# Altium PCB miniboar.PcbDoc
Units mil, origin at the board's own origin, x right, y up, seen from the top; angles counter-clockwise.
Board outline 2075 x 1385.55 mil, 2 copper layers (Top Layer, Bottom Layer); 66 components, 47 nets, 245 pads, 70 vias.
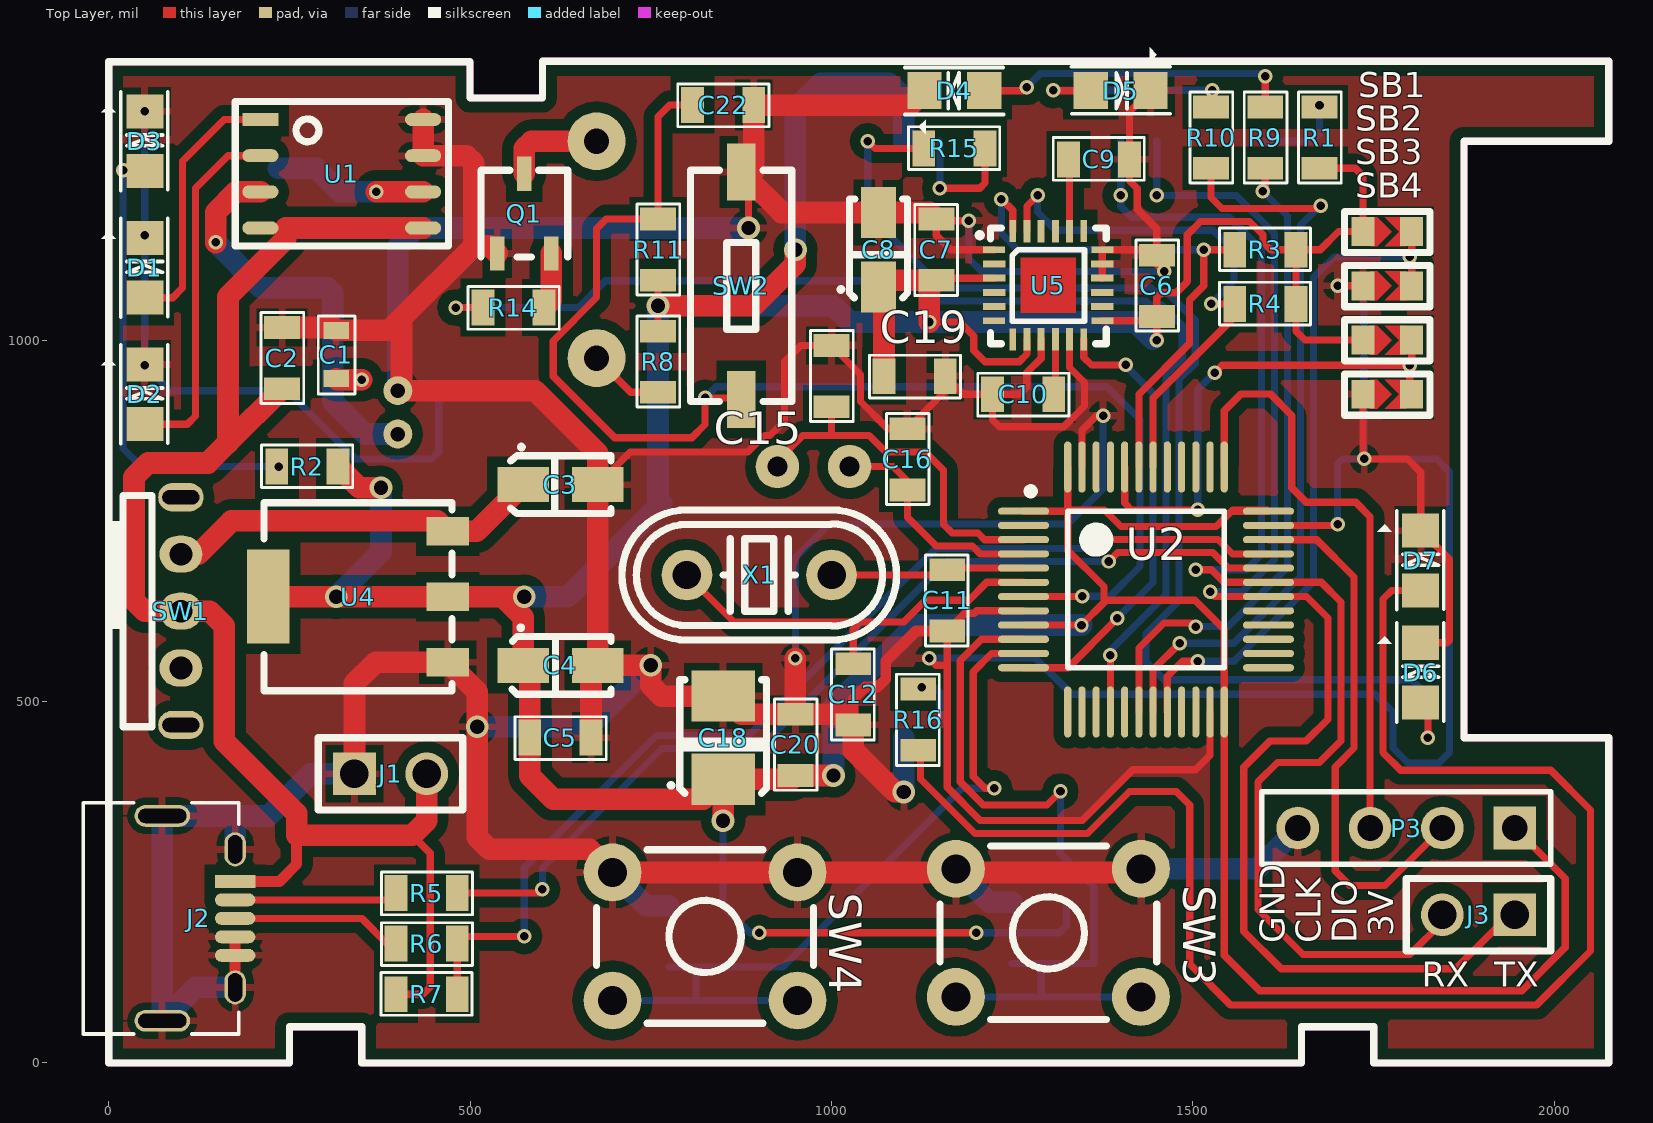
[diagram p0: Top Layer view]
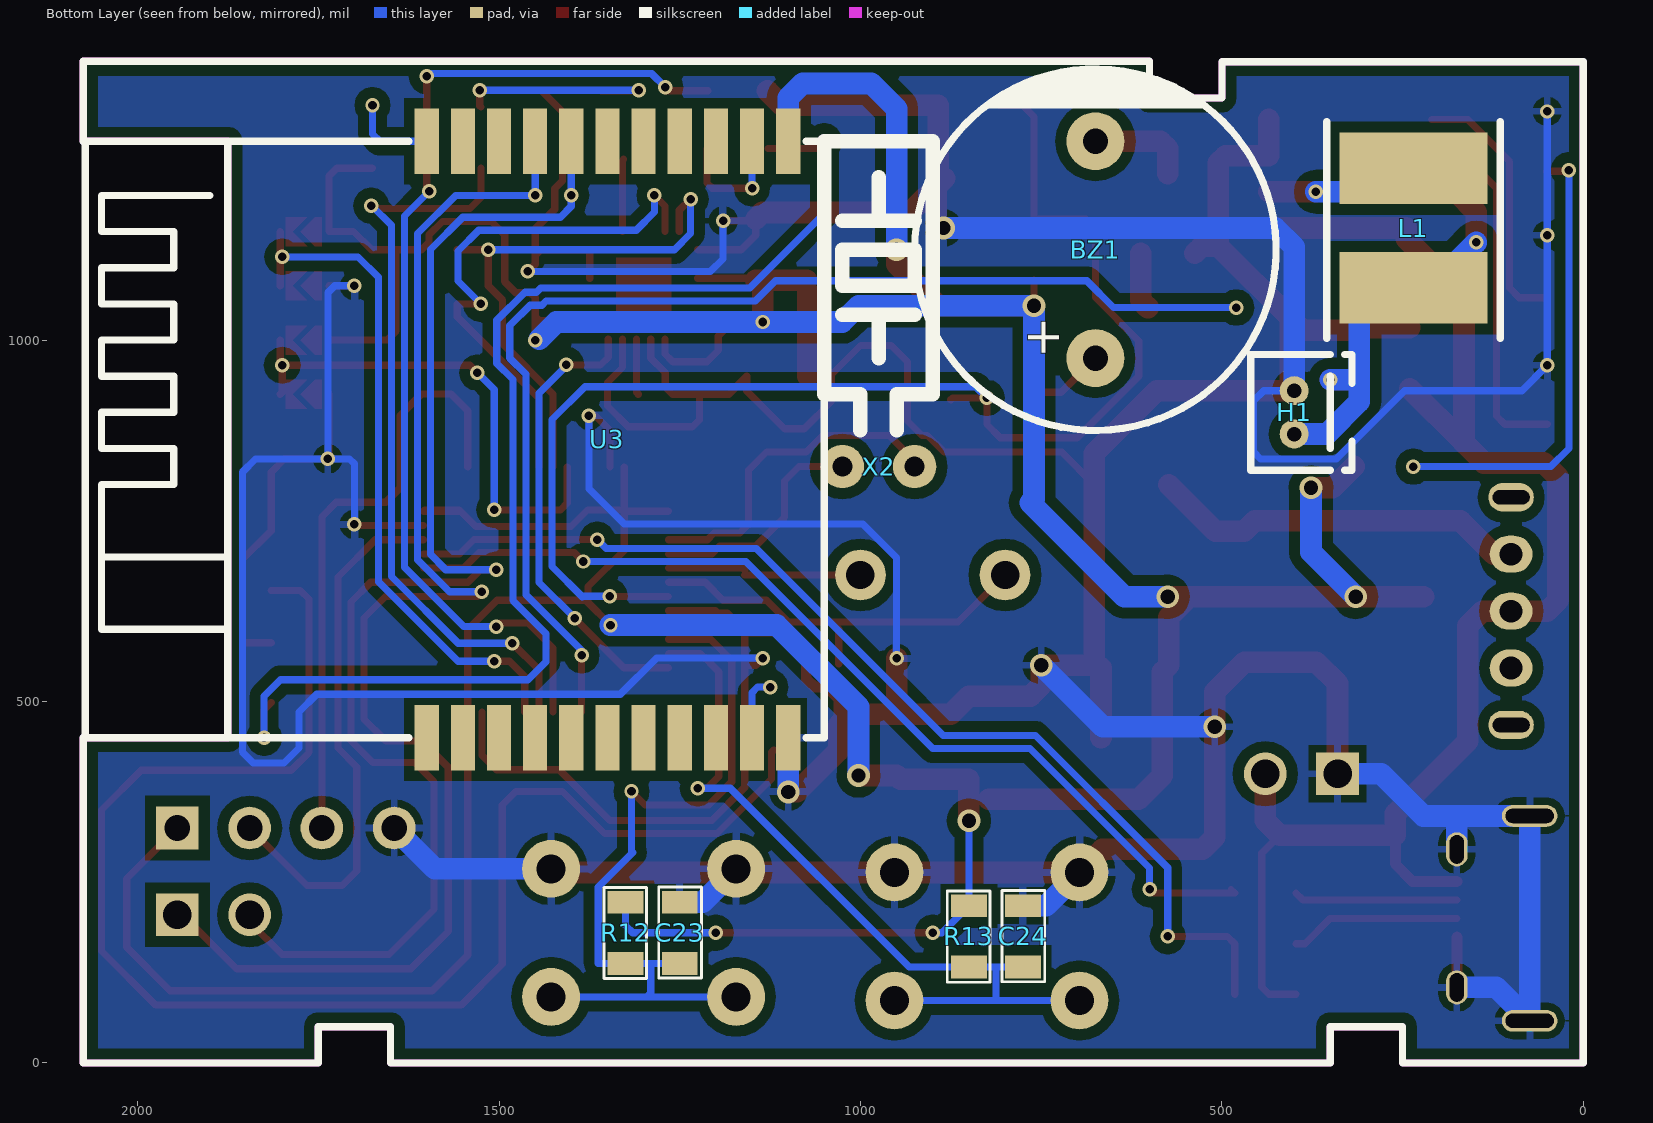
[diagram p1: Bottom Layer view, seen from below]
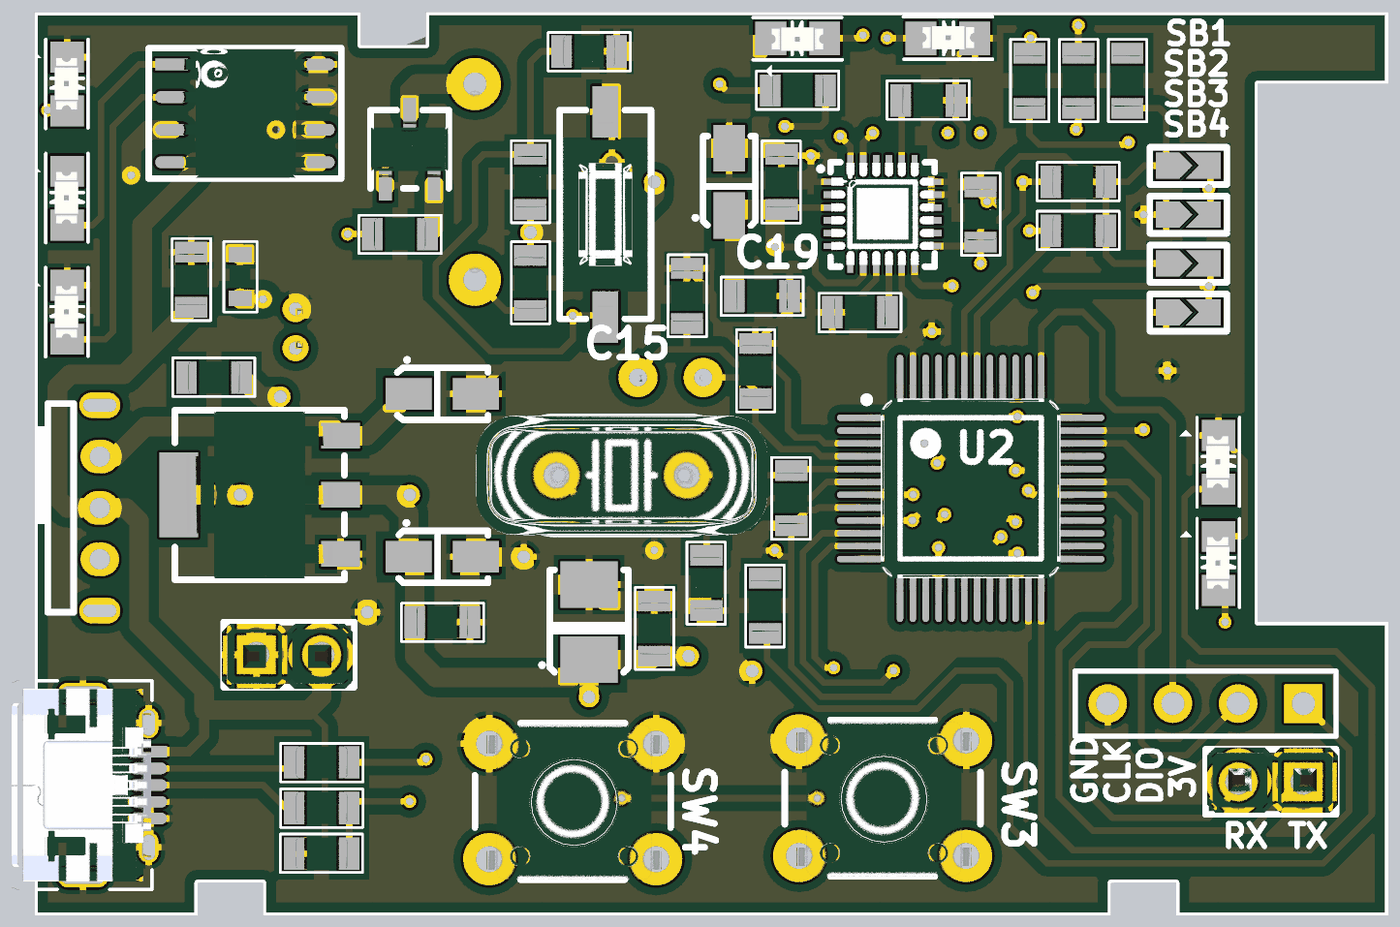
[diagram p2: 3D render of the assembled board from above, using the file's embedded part models]
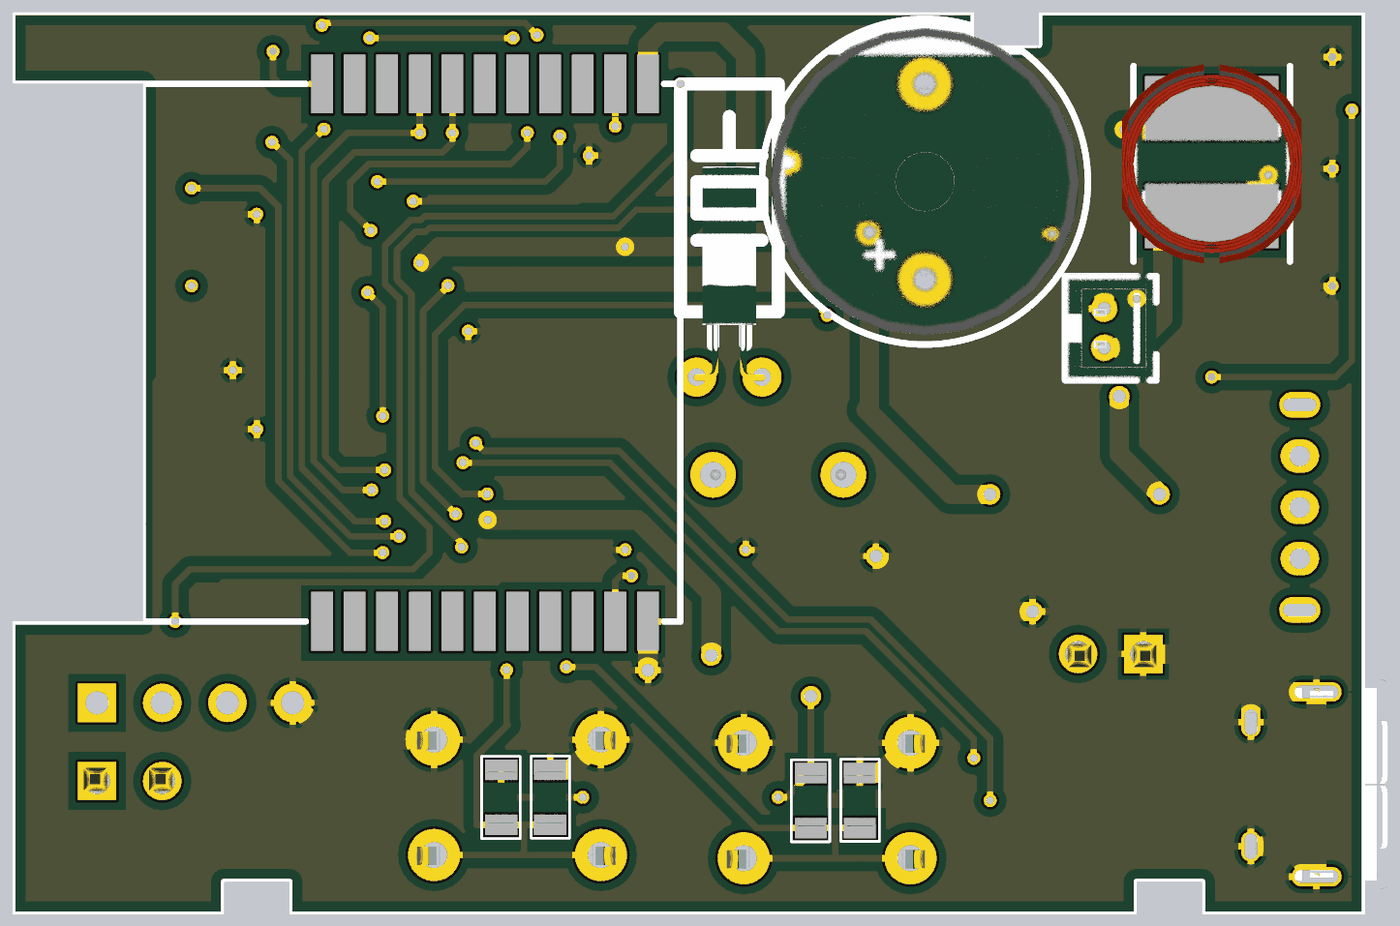
[diagram p3: 3D render of the assembled board from below, using the file's embedded part models]

## Layer stack, top to bottom
Top Solder: solder mask 0.4, Solder Resist, Dk 3.5
Top Layer: signal copper 1.4
Dielectric 1: dielectric 12.6, FR-4, Dk 4.8
Bottom Layer: signal copper 1.4
Bottom Solder: solder mask 0.4, Solder Resist, Dk 3.5

## Board outline
250,0 250,50 350,50 350,0 1650,0 1650,50 1750,50 1750,0 2075,0 2075,450 1875,450 1875,1275 2075,1275 2075,1385.55 600,1385.55 600,1335 500,1335 500,1385 0,1385 0,0

## Design rules (kind name [scope] priority, off if disabled: settings)
Clearance [All] p1: gap=15
PolygonConnect [All] p1: connectstyle=Relief reliefconductorwidth=10 reliefentries=4 polygonreliefangle="90 Angle" airgapwidth=10
RoutingVias [All] p1: holewidth=19.68 width=30 viastyle="Through Hole" minholewidth=11.81 minwidth=20 maxholewidth=137.8 maxwidth=200
SolderMaskExpansion [All] p1: expansion=4
Width [All] p1: maxlimit=30 minlimit=8 preferedwidth=10
30 further rules are at their usual default settings.

## Components (designator, comment, footprint, x,y, rotation, side; value= is the part's Value field where it differs from the comment)
BZ1 "Buzz" BUZZER_12mmx9mm 675,1125 r90 bottom
C1 "10uF" RES0603 315,980 r270 top
C2 "22uF" RES0805 240,975 r270 top
C3 "220uF" CAP_T_3216–18_CASE-A 625,800 r0 top
C4 "220uF" CAP_T_3216–12_CASE-S 625,550 r0 top
C5 "104" RES0805 625,450 r180 top
C6 "10nF" RES0805 1450,1075 r270 top
C7 "100nF" RES0805 1145,1125 r90 top
C8 "100uF" CAP_T_3216–12_CASE-S 1065,1125 r90 top
C9 "2.2nF" RES0805 1370,1250 r0 top
C10 "0.1uF" RES0805 1265,925 r180 top
C11 "20pF" RES0805 1160,640 r90 top
C12 "20pF" RES0805 1030,510 r90 top
C15 "10pF" RES0805 1000,950 r270 top
C16 "10pF" RES0805 1105,835 r270 top
C18 "22uF" CAP_T_3528–21_CASE-B 850,450 r90 top
C19 "104" RES0805 1115,950 r180 top
C20 "104" RES0805 950,440 r270 top
C22 "104" RES0805 850,1325 r180 top
C23 "104" RES0805 1250,180 r270 bottom
C24 "104" RES0805 775,175 r270 bottom
D1 "LED" LED_SMD_0805 50,1100 r90 top
D2 "LED" LED_SMD_0805 50,925 r90 top
D3 "LED-RED" LED_SMD_0805 50,1275 r90 top
D4 "LED-RED" LED_SMD_0805 1170,1345 r180 top
D5 "LED-RED" LED_SMD_0805 1400,1345 r0 top
D6 "LED-RED" LED_SMD_0805 1815,540 r90 top
D7 "LED-RED" LED_SMD_0805 1815,695 r90 top
H1 "PIN" "HEADER 2_1" 400,900 r270 bottom
J1 "PW" J_2 340,400 r0 top
J2 "USB_IN" "MicroUSB MK5P ZX62D-B-5PA8" 175,200 r90 top
J3 "USART_1" J_2 1945,205 r180 top
L1 "4.7uH" IND_CD54 235,1155 r0 bottom
P3 "SWD" HDR1X4 1945,325 r180 top
Q1 "C1815" SOT_23_TO236_TRAN_ECB 575,1175 r0 top
R1 "100k" RES0805 1675,1280 r270 top
R2 "150" RES0805 275,825 r0 top
R3 "4.7k" RES0805 1600,1125 r0 top
R4 "4.7K" RES0805 1600,1050 r0 top
R5 "22R" RES0805 440,235 r180 top
R6 "22R" RES0805 440,165 r180 top
R7 "100k" RES0805 440,95 r0 top
R8 "120" RES0805 760,970 r270 top
R9 "220" RES0805 1600,1280 r270 top
R10 "150" RES0805 1525,1280 r270 top
R11 "100k" RES0805 760,1125 r270 top
R12 "100k" RES0805 1325,180 r90 bottom
R13 "100k" RES0805 850,175 r90 bottom
R14 "102" RES0805 560,1045 r180 top
R15 "220" RES0805 1170,1265 r0 top
R16 "150" RES0805 1120,475 r90 top
SB1 "Open" SB_0603 1768.75,1150 r180 top
SB2 "Open" SB_0603 1768.75,1075 r180 top
SB3 "Open" SB_0603 1768.75,1000 r180 top
SB4 "Open" SB_0603 1768.75,925 r180 top
SW1 "SW_5Pin" Switch5pin 100,625 r90 top
SW2 "SW_2" SW_2pin_SMD 875,1075 r270 top
SW3 "SW1" SW_4PIN_6x6x5 1300,180 r0 top
SW4 "SW2" SW_4PIN_6x6x5 825,175 r0 top
U1 "HT4928S" SOP8 210,1305 r0 top
U2 "STM32F103C8T6" LQFP48_N 1435,655 r0 top
U3 "Zigbee_SMD" Zigbee_SMD 1600,450 r90 bottom locked
U4 "AMS1117CD-3.3V" SOT_223 345,645 r90 top
U5 "MPU6050" QFN_24(4x4x0.9) 1225,1125 r0 top
X1 "12MHz" "OSC_2pin 200ml" 800,675 r0 top
X2 "32kHz" OSC_3x8mm 1025,825 r180 bottom

## Footprints (in the part's own frame and the unit in brackets; to place one, negate y for a bottom-side part, rotate by r counter-clockwise, add the part's x,y. Pads: shape width x height; smd on the part's side, far side on the other; paste and mask are expansions set on the pad)
BUZZER_12mmx9mm [mil] "2pin_W300mil"
  round 80 hole 35: 1(-150,0) 2(150,0)
  silkscreen extent -250,-250 250,250, body extent -236,-236 236,236, height 335
CAP_T_3216–12_CASE-S [mm]
  rect 1.8x1.23 smd: 1(-1.31,0) 2(1.31,0)
  silkscreen extent -1.7,-1.02 1.78,1.35, body extent -1.7,-0.9 1.7,0.9, height 1.8
CAP_T_3216–18_CASE-A [mm]
  rect 1.8x1.23 smd: 1(-1.31,0) 2(1.31,0)
  silkscreen extent -1.75,-1.02 1.78,1.35, body extent -1.7,-0.79 1.7,0.81, height 2.05
CAP_T_3528–21_CASE-B [mm]
  rect 1.8x2.23 smd: 1(-1.46,0) 2(1.46,0)
  silkscreen extent -1.96,-1.52 2.03,1.85, body extent -1.74,-1.39 1.95,1.43, height 2.74
HDR1X4 [mm] "Connector; Header; 4 Position"
  rect 1.5x1.5 hole 0.9: 1(0,0)
  round 1.5 hole 0.9: 2(2.54,0) 3(5.08,0) 4(7.62,0)
  silkscreen extent -1.27,-1.27 8.89,1.27, body extent -1.27,-1.27 8.89,1.27, height 7
"HEADER 2_1" [mil] "W60mil"
  round 40 hole 20: 1(-30,0) 2(30,0)
  silkscreen extent -80,-60 80,80, body extent -84,-58 84,80, height 210
IND_CD54 [mm]
  rect 5.2x2.5 smd: 1(0,2.1) 2(0,-2.1)
  silkscreen extent -3.05,-3.74 3.05,3.88, body extent -3.5,-3.82 3.5,3.96, height 5
J_2 [mm]
  rect 1.5x1.5 hole 1: 1(0,0)
  round 1.5 hole 1: 2(2.54,0)
  silkscreen extent -1.27,-1.27 3.81,1.27, body extent -1.34,-1.34 3.74,1.2, height 7.95
LED_SMD_0805 [mm] "LED0805"
  rect 1.2x1.3 smd: 1(-1.05,0) 2(1.05,0)
  silkscreen extent -1.74,-0.81 1.74,1.52, body extent -1.01,-0.42 1.05,0.48, height 0.85
LQFP48_N [mm] "QFP, 48-Leads, Body 7x7mm, Pitch 0.5mm, IPC Medium Density"
  oval 1.8x0.249 smd: 1(-4.304,2.75) 2(-4.304,2.25) 3(-4.304,1.75) 4(-4.304,1.25) 5(-4.304,0.75) 6(-4.304,0.25) 7(-4.304,-0.25) 8(-4.304,-0.75) 9(-4.304,-1.25) 10(-4.304,-1.75) 11(-4.304,-2.25) 12(-4.304,-2.75) 25(4.304,-2.75) 26(4.304,-2.25) 27(4.304,-1.75) 28(4.304,-1.25) 29(4.304,-0.75) 30(4.304,-0.25) 31(4.304,0.25) 32(4.304,0.75) 33(4.304,1.25) 34(4.304,1.75) 35(4.304,2.25) 36(4.304,2.75)
  oval 0.249x1.8 smd: 13(-2.75,-4.304) 14(-2.25,-4.304) 15(-1.75,-4.304) 16(-1.25,-4.304) 17(-0.75,-4.304) 18(-0.25,-4.304) 19(0.25,-4.304) 20(0.75,-4.304) 21(1.25,-4.304) 22(1.75,-4.304) 23(2.25,-4.304) 24(2.75,-4.304) 37(2.75,4.304) 38(2.25,4.304) 39(1.75,4.304) 40(1.25,4.304) 41(0.75,4.304) 42(0.25,4.304) 43(-0.25,4.304) 44(-0.75,4.304) 45(-1.25,4.304) 46(-1.75,4.304) 47(-2.25,4.304) 48(-2.75,4.304)
  silkscreen extent -4.17,-2.75 2.75,3.57, body extent -4.5,-4.5 4.5,4.5, height 1.5
"MicroUSB MK5P ZX62D-B-5PA8" [mm] "5PIN SMT+DIP"
  rect 0.45x1.42 smd: 1(1.3,0)
  oval 0.45x1.42 smd: 2(0.65,0) 3(0,0) 4(-0.65,0) 5(-1.3,0)
  oval 0.762x1.956 hole 0.5 slot 1.7 at 90 deg: 5(-3.6,2.56) 5(3.6,2.56)
  oval 1.194x0.762 hole 0.5 slot 1 at 0 deg: 5(-2.425,0) 5(2.425,0)
  silkscreen extent -4.06,-0.13 4.06,5.33, body extent -4.1,-0.09 4.1,5.34, height 2.75
"OSC_2pin 200ml" [mil]
  round 70 hole 39.37: 1(0,0) 2(200,0)
  silkscreen extent -90,-90 290,90, body extent -123,-92 323,92, height 162
OSC_3x8mm [mil] "2pin100ml"
  round 60 hole 27.56: 1(0,0) 2(100,0)
  silkscreen extent -25,50 125,450, body extent -5,-6 105,324, height 91
QFN_24(4x4x0.9) [mm]
  rect 0.775x0.225 smd: 1(0,0) 6(0,-2.5) 13(3.8,-2.5) 18(3.8,0)
  rect 0.8x0.25 smd: 2(0,-0.5) 3(0,-1) 4(0,-1.5) 5(0,-2) 14(3.8,-2) 15(3.8,-1.5) 16(3.8,-1) 17(3.8,-0.5)
  rect 0.225x0.775 smd: 7(0.65,-3.15) 12(3.15,-3.15) 19(3.15,0.65) 24(0.65,0.65)
  rect 0.25x0.8 smd: 8(1.15,-3.15) 9(1.65,-3.15) 10(2.15,-3.15) 11(2.65,-3.15) 20(2.65,0.65) 21(2.15,0.65) 22(1.65,0.65) 23(1.15,0.65)
  Top Layer region: 2.871,-0.279 2.871,-2.21 0.94,-2.21 0.94,-0.279
  silkscreen extent -0.56,-3.3 3.94,0.76, body extent -0.09,-3.24 3.91,0.76, height 1
RES0603 [mm]
  rect 0.6x0.9 smd: 1(-0.85,0) 2(0.85,0)
  silkscreen extent -1.36,-0.64 1.39,0.66, body extent -0.8,-0.4 0.8,0.4, height 0.3
RES0805 [mm]
  rect 0.8x1.26 smd: 1(-1.075,0) 2(1.075,0)
  silkscreen extent -1.61,-0.74 1.59,0.76, body extent -1,-0.62 1,0.63, height 0.78
SB_0603 [mil] "Jumper"
  rect 32x40 smd: 1(33.75,0) 2(-33.75,0)
  Top Layer region: -26.25,0 -16.25,0 3.75,-20 -26.25,-20
  Top Layer region: -26.25,0 -16.25,0 3.75,20 -26.25,20
  Top Layer region: 23.75,20 13.75,20 -6.25,0 13.75,-20 23.75,-20
  silkscreen extent -59,-28 59,29
SOP8 [mil] "SOP8_8pin W_50mil H_225mil"
  rect 50x18 smd: 1(0,0)
  oval 50x18 smd: 2(0,-50) 3(0,-100) 4(0,-150) 5(225,-150) 6(225,-100) 7(225,-50) 8(225,0)
  silkscreen extent -35,-175 260,25, body extent -5,-174 233,24, height 63
SOT_23_TO236_TRAN_ECB [mm]
  rect 0.5x1.2 smd: B(0.95,-1.4) C(0,1.4) E(-0.95,-1.4)
  silkscreen extent -1.52,-1.52 1.52,1.52, body extent -1.5,-1.5 1.5,1.5, height 1.3
SOT_223 [mm]
  rect 1x1.5 smd: 1(-2.3,-3.15) 2(0,-3.15) 3(2.3,-3.15)
  rect 3.3x1.5 smd: 2(0,3.15)
  silkscreen extent -3.3,-3.3 3.3,3.3, body extent -3.25,-3.48 3.25,3.48, height 1.66
SW_2pin_SMD [mm]
  rect 2x1 smd: 1(-4,0) 2(4,0)
  silkscreen extent -4.06,-1.78 4.06,1.78, body extent -4,-1.8 4,1.8, height 2.4
SW_4PIN_6x6x5 [mil]
  round 80 hole 40: 1(-127.95,88.58) 2(127.95,88.58) 3(127.95,-88.58) 4(-127.95,-88.58)
  silkscreen extent -150,-120 150,120, body extent -150,-120 154,117, height 207
Switch5pin [mm]
  oval 1x1.6 hole 0.5 slot 1.3 at 90 deg: 0(-4,0) 0(4,0)
  oval 1.3x1.5 hole 0.8: 1(-2,0) 2(0,0) 3(2,0)
  silkscreen extent -4.06,1.02 4.06,2.54
Zigbee_SMD [mm]
  rect 2.3x0.85 smd: 1(0,0) 2(0,-1.27) 3(0,-2.54) 4(0,-3.81) 5(0,-5.08) 6(0,-6.35) 7(0,-7.62) 8(0,-8.89) 9(0,-10.16) 10(0,-11.43) 11(0,-12.7) 12(20.955,-12.7) 13(20.955,-11.43) 14(20.955,-10.16) 15(20.955,-8.89) 16(20.955,-7.62) 17(20.955,-6.35) 18(20.955,-5.08) 19(20.955,-3.81) 20(20.955,-2.54) 21(20.955,-1.27) 22(20.955,0)
  silkscreen extent 0,-13.97 20.95,12

## Part data
BZ1: library part BUZZER
C1 C2 C5 C6 C7 C9 C10 C11 C12 C15 C16 C19 C20 C22 C23 C24: library part CAP
C3 C4 C8 C18: library part CAP_E
D3 D4 D5 D6 D7: library part LED
H1: library part H2
J1 J3: library part J2
J2: library part "USB Micro 5pin", "5PIIN"
L1: library part "Inductor Iron", "Magnetic-Core Inductor"
P3: library part "Header 4", "Header, 4-Pin"
Q1: library part NPN, "TRAN_NGUOC"
R1 R2 R3 R4 R5 R6 R7 R8 R9 R10 R11 R12 R13 R14 R15 R16: library part RES
SB1 SB2 SB3 SB4: library part "Circuit Breaker", "Circuit Breaker"
SW2: library part SW_2PIN
SW3 SW4: library part SW_4PIN
U2: "ARM Cortex-M3 32-bit MCU, 64 KB Flash, 20 KB Internal RAM, 37 I/Os, 48-pin LQFP, -40 to 85 degC, Tray"
U4: library part AMS1117, "AMS1117 IN<12V"
U5: "I2C 6-axis  accelerometer_ gyroscope"
X1 X2: library part OSC, "X 12MHz"

## Via types
v1: diameter 20, hole 11.81, Top Layer to Bottom Layer, 56 vias
v2: diameter 31.5, hole 19.68, Top Layer to Bottom Layer, 11 vias
v3: diameter 19.68, hole 11.81, Top Layer to Bottom Layer, 3 vias

## Nets (pads, with @x,y where several pads share a name; then routed paths per layer and width w, separated by ;. In a path a pad name is that pad's centre, name@x,y a point inside that pad or via, vN(x,y) a via of type N, cw(c..) or ccw(c..) an arc to the next point about the centre after c; other vN are vias at no path point)
3.3V: C4.1 C5.2 C6.2 C7.1 C8.1 C18.1 C19.2 C20.2 P3.1 R1.2 R2.2 R3.2 R4.2 R8.1 R11.2 R12.2 R13.2 SB1.1 SB3.1 U2.1 U2.9 U2.24 U2.36 U2.48 U3.12 U4.2 U5.3 U5.8 U5.13 | length 7911.5
  Top Layer w10: R8.1 v2(760,1047.5) R11.2 ; v1(900,180) v1(1200,180) ; v1(1135,1025) 1177.28,1025 1196.73,1005.55 1196.73,985.55 1212.28,970 1259.54,970 1270.28,980.73 U5.8 ; C7.1 1147.95,1085.63 U5.3 ; U2.9 v1(1345.79,605.79) 1378,638 ; U2.1 1325,763.27 1326.73,765 ; U2.48 1326.73,765 ; U5.13 1443.9,1026.57 C6.2 ; v1(1450,1000) C6.2 ; R1.2 1724.61,1237.68 1735,1227.28 SB1.1 1701.18,1150 1676.18,1125 R3.2 ; SB3.1 1655,1000 1642.32,1012.68 R4.2 R3.2 ; P3.1 2015,255 2015,160 1955,100 1592.28,100 1543.27,149.02 U2.24 1543.27,599.52 1502.79,640 1376.73,640 1376.73,658.93 1326.73,708.93 1326.73,765 ; 1326.73,765 1377.53,765 1400.53,742 1532,742 1553.27,763.27 ; C6.2 1450,1058.82 1456.73,1065.55 1476.73,1065.55 1492,1080.82 1492,1145.55 1510.45,1164 1578.28,1164 1596.73,1145.55 1596.73,1135.55 1607.28,1125 R3.2 ; 1553.27,763.27 U2.36 1602.72,765 1555,765 1553.27,763.27
  Top Layer w30: U4.2@220.98,645 v2(315,645) 469.02,645 545,645 ; R2.2 346.77,795.55 v2(376.73,795.55) ; v2(575,645) 545,645 ; v2(760,1047.5) 892.5,1047.5 950,1105 v2(950,1125) ; C18.1@822.48,365 615,365 582.68,397.32 C5.2 582.68,540.75 C4.1 573.43,616.57 545,645 ; v2(850,335) C18.1 944.84,392.52 C20.2 v2(1002.68,397.68) ; C19.2 C8.1@1072.68,1065.75 ; C8.1@1074.25,1082.68 C7.1 1135,1072.68 v1(1135,1025)
  Bottom Layer w10: v2(850,335) R13.2 887.32,180 v1(900,180) ; v1(1200,180) 1315,180 1325,190 R12.2
  Bottom Layer w30: v2(315,645) 376.73,706.73 v2(376.73,795.55) ; v2(575,645) 635,645 765,775 760,780 v2(760,1047.5) 1002.5,1047.5 1025,1025 v1(1135,1025) 1420.4,1025 v1@1444.17,1001.24 ; v2(950,1125) 950,1320 985,1355 1080,1355 1100,1335 U3.12 ; v2(1002.68,397.68) 1002.68,492.68 1115.79,605.79 v1(1345.79,605.79)
5V: C2.2 J1.2 J2.1 R7.1 SW1.2 U1.4 U1.5 | length 2077.2
  Top Layer w10: R7.1 435,95 445,105 445,290 420,315
  Top Layer w15: J2.1 236.18,251.18 260,275 260,315
  Top Layer w30: C2.2 165,857.68 ; U1.5 245,1155 245,1140 165,1060 165,857.68 ; J1.2 440,335 420,315 260,315 260,345 160,445 160,605 140,625 SW1.2 50,625 35,640 35,810 55,830 137.32,830 165,857.68
B-: C1.1 C2.1 C3.2 C4.2 C5.1 C6.1 C7.2 C8.2 C9.2 C10.2 C11.1 C12.1 C15.1 C16.1 C18.2 C19.1 C20.1 C22.1 C23.1 C24.1 D1.2 D2.2 D3.2 D4.2 D5.2 D6.2 D7.2 H1.1 J1.1 J2.4 J2.5 P3.4 Q1.E SB2.1 SB4.1 SW2.1 SW3.1 SW3.2 SW4.1 SW4.2 U1.7 U1.8 U2.8 U2.23 U2.35 U2.47 U3.11 U4.1 U5.1 U5.9 U5.11 U5.16 U5.17 U5.18 | length 13789
  Top Layer w10: v3(50,965) D2.2 ; D1.2 v3(50,1145) ; C5.1 676.57,459.25 C4.2 ; C3.2 721.57,845 884.19,845 907.19,868 915,868 935,888 935,970 957.32,992.32 C15.1 1040,952.32 1040,915 1077.68,877.32 C16.1 1157.32,929.65 C19.1 1182.32,925 C10.2 ; v2(885,1155) 885,1222.48 885,1225.35 SW2.1@892.32,1232.68 ; v2@1097.5,377.5 v2(1100,375) ; v1(1135,560) 1145,550 1160,550 ; v1(1190,1165) 1147.32,1165 C7.2 1145,1145 1165,1125 U5.1 ; U2.8 1200.93,625.47 1197.46,622 1184.32,622 C11.1 1160,550 ; U5.9 1289.96,974.96 1270,955 1270,935 1260,925 C10.2 ; U5.11 1329.33,961.93 1350,941.26 1350,908.74 1321.26,880 1232.28,880 1222.68,889.61 C10.2 ; U2.47 1346.42,875.24 1366.73,895.55 v1(1375.55,895.55) ; U5.16 U5.17 U5.18 1442.32,1125 C6.1 ; D5.2 1412.32,1315.98 C9.2 1412.32,1220.2 1423,1209.53 1423,1181 1450,1154 C6.1 ; v1(1460,1095) 1450,1105 C6.1 ; U2.23 1523.58,425.55 1503.58,405.55 1416.73,405.55 1346.73,335.55 1205.82,335.55 1160,381.37 1160,550 ; U2.35 1693.58,743.58 1695,745 v1(1700,745) ; v1(1700,1075) SB2.1 ; SB4.1 1735,837.28 v1(1736.73,835.55) 1796.73,835.55 1815,817.28 D7.2 1855,696.34 1855,585 1851.34,581.34 D6.2
  Top Layer w15: J2.5@175,104.53 175,148.82 J2.4 ; C12.1 1030,503.27 1046.73,520 1063.74,520 1075,531.26 1075,556.01 1116.67,597.68 C11.1
  Top Layer w30: C2.1 311.14,1017.32 C1.1 388.46,1013.46 405,1030 ; J1.1 340,525 369.45,554.45 U4.1 510,513.46 v2(510,465) 510,312.28 526.73,295.55 665.08,295.55 SW4.1 SW4.2 1422.95,263.58 SW3.2 ; U1.8 U1.7 495,1255 505,1245 505,1130 ; Q1.E 527.48,1130 505,1130 ; C5.1 667.32,546.3 676.57,555.55 C3.2 676.57,843.43 590,930 H1.1 405,935 405,1030 ; C4.2 v2(750,550) 750,522.28 764.8,507.48 C18.2 875.16,482.32 C20.1 ; SW2.1@883.56,1223.92 885,1222.48 930.91,1176.57 C8.2 1135.75,1176.57 C7.2 ; SW2.1@892.32,1232.68 C22.1 1108.66,1325 D4.2 ; v1(950,560) C20.1 ; v2@1095,375 1087.28,375 1030,432.28 C12.1 1015.35,482.32 C20.1 ; 405,1030 505,1130
  Bottom Layer w10: v3(50,1316.34) v3(50,1145) v3(50,965) 85,930 247.28,930 341.72,835.55 446.73,835.55 456.73,845.55 456.73,915.55 442.28,930 H1.1 ; v1(950,560) 950,698.82 996.73,745.55 1326.73,745.55 1375.55,794.37 v1(1375.55,895.55) ; v1(1135,560) 1282.28,560 1332.28,510 1752.28,510 1776.73,485.55 1776.73,435.55 1797.28,415 1840,415 1855,430 1855,817.28 1836.73,835.55 v1(1736.73,835.55) ; v1(1190,1165) 1190,1112.28 1207.28,1095 v1(1460,1095) ; v1(1700,745) 1700,828.82 1706.73,835.55 v1(1736.73,835.55) ; v1(1700,1075) 1727.28,1075 1736.73,1065.55 v1(1736.73,835.55)
  Bottom Layer w30: J2.5@175,104.53 120.47,104.53 74.21,58.27 74.21,341.73 176.73,341.73 ; J2.5@175,295.47 175,340 176.73,341.73 ; J1.1 279.53,400 221.26,341.73 176.73,341.73 ; H1.1 400,1128.82 426.18,1155 v2(885,1155) ; v2(510,465) 665,465 v2(750,550) ; SW4.1 743.31,217.32 C24.1 ; v2(1100,375) U3.11 ; SW3.1 1218.31,222.32 C23.1 ; SW3.2 1588.58,268.58 P3.4
BOOT0: SB3.2 SB4.2 U2.44 | length 706
  Top Layer w10: U2.44 1405.47,774.53 1415,765 v1(1506.73,765) ; v1(1530,955) 1540,965 v1(1800,965) ; SB4.2 1800,927.5 v1(1800,965) ; SB3.2 1802.5,967.5 v1(1800,965)
  Bottom Layer w10: v1(1506.73,765) 1506.73,931.73 v1(1530,955)
BOOT1: SB1.2 SB2.2 U2.20 | length 946.6
  Top Layer w10: U2.20 1464.53,534.53 1485.55,555.55 v1(1506.73,555.55) ; SB2.2 SB1.2
  Bottom Layer w10: v1(1506.73,555.55) 1556.73,555.55 1666.73,665.55 1666.73,1086.73 1695,1115 v1(1800,1115)
BUZZ: R14.2 U2.16 | length 1660.3
  Top Layer w10: v1(480,1045) R14.2 ; v1@1385,565 v1(1385.79,564.21) U2.16
  Bottom Layer w10: v1(480,1045) 650,1045 687,1082 1117.54,1082 1145.54,1054 1434.89,1054 1440.64,1048.25 1456.75,1048.25 1485,1020 1485,975 1462.73,952.73 1462.73,647.73 1385.79,570.79 v1(1385.79,564.21)
I2C1_SCL: R4.1 U2.42 U5.23 | length 763.7
  Top Layer w10: U5.23 1270.28,1185.28 v1(1285,1200) ; U2.42 1444.84,919.39 1557.68,1032.22 R4.1 v1(1525,1050)
  Bottom Layer w10: v1(1285,1200) 1285,1177.28 1310.28,1152 1528,1152 1556.73,1123.27 1556.73,1081.73 v1(1525,1050)
I2C1_SDA: R3.1 U2.43 U5.24 | length 768.3
  Top Layer w10: v1(1235,1195) 1250.59,1179.41 U5.24 ; U2.43 1425.16,925.16 1495,995 1495,1055 1515,1075 v1(1515,1125) R3.1
  Bottom Layer w10: v1(1235,1195) 1235,1147.28 1257.28,1125 v1(1515,1125)
INT_EXT: U2.12 U5.12 | length 632
  Top Layer w10: U2.12 1327.39,546.73 1395,614.34 v1(1395,615) ; U5.12 1349.02,975.98 1359.45,965.55 v1(1406.73,965.55)
  Bottom Layer w10: v1(1395,615) 1444.73,664.73 1444.73,926.37 1406.73,964.37 v1(1406.73,965.55)
LED1: R9.2 U2.18 | length 911.8
  Top Layer w10: U2.18 1425.16,573.98 1459.73,608.55 1499.01,608.55 v1(1503.9,603.66) ; v1(1596.73,1205.55) 1600,1208.82 R9.2
  Bottom Layer w10: v1(1503.9,603.66) 1548.84,603.66 1630.73,685.55 1630.73,1171.55 v1(1596.73,1205.55)
LED2: R10.2 U2.19 | length 1040.5
  Top Layer w10: U2.19 1444.84,543.88 v1(1481.62,580.66) ; R10.2 1525,1197.28 1540.28,1182 1673.18,1182 v1(1676.73,1185.55)
  Bottom Layer w10: v1(1481.62,580.66) 1556.39,580.66 1648.73,673.01 1648.73,1158.73 1675.55,1185.55 v1(1676.73,1185.55)
LED_CSN: U3.17
LED_ZIGBEE0: R15.2 U3.13 | length 178
  Top Layer w10: v1(1150,1210) 1205,1210 1212.32,1217.32 R15.2
  Bottom Layer w10: v1(1150,1210) U3.13
LED_ZIGBEE1: R16.2 U3.10 | length 70.3
  Top Layer w10: R16.2@1122.68,520 v1(1125,520)
  Bottom Layer w10: v1(1125,520) 1142.28,520 1150,512.28 U3.10@1150,472.5
NetBZ1_1: BZ1.1 R8.2 | length 104.6
  Top Layer w10: BZ1.1 722.32,927.68 R8.2
NetBZ1_2: BZ1.2 Q1.C | length 139
  Top Layer w30: Q1.C 575,1265 585,1275 BZ1.2
NetC1_2: C1.2 H1.2 L1.1 U1.3 | length 640.9
  Top Layer w30: v1(148,1135) 148,1177 176,1205 U1.3 ; C1.2 316.54,945 v1(350,945)
  Bottom Layer w30: v1(148,1135) 210.68,1072.32 L1.1 302.68,1072.32 310,1065 310,945 ; v1(350,945) 310,945 ; H1.2 355,870 310,915 310,945
NetC3_1: C3.1 SW1.3 U4.3 | length 525.3
  Top Layer w30: SW1.3 123.74,703.74 170,750 454.57,750 U4.3 508.98,735.55 C3.1
NetC9_1: C9.1 U5.20 | length 100.1
  Top Layer w10: C9.1 1329.33,1248.35 U5.20
NetC10_1: C10.1 U5.10 | length 76.9
  Top Layer w10: C10.1 1309.65,927.32 U5.10
NetD1_1: D1.1 U1.1 | length 364.5
  Top Layer w10: D1.1 88.66,1058.66 102,1072 102,1247 160,1305 U1.1
NetD2_1: D2.1 U1.2 | length 498.3
  Top Layer w10: D2.1 108.66,883.66 120,895 120,1210 165,1255 U1.2
NetD3_1: D3.1 R2.1 | length 643.2
  Top Layer w10: v1(20,1235) 21.34,1233.66 D3.1 ; R2.1 v1(235,825)
  Bottom Layer w10: v1(20,1235) 20,850 45,825 v1(235,825)
NetD4_1: D4.1 R9.1 | length 445.5
  Top Layer w10: D4.1 1270,1345 v1(1270,1350) ; R9.1 v1(1600,1365)
  Bottom Layer w10: v1(1270,1350) 1288.55,1368.55 1596.45,1368.55 v1(1600,1365)
NetD5_1: D5.1 R10.1 | length 296.1
  Top Layer w10: v1(1306.73,1345.55) 1307.28,1345 D5.1 ; R10.1 1526.73,1324.06 v1(1526.73,1345.55)
  Bottom Layer w10: v1(1306.73,1345.55) v1(1526.73,1345.55)
NetD6_1: D6.1 R15.1 | length 1716.4
  Top Layer w10: v1(1050,1275) 1060,1265 R15.1 ; D6.1 1825,488.66 v1(1825,450)
  Bottom Layer w10: v1(1050,1275) 1050,1175 1153,1072 1442.34,1072 1448.09,1066.25 1464.2,1066.25 1503,1027.46 1503,967.54 1480.73,945.28 1480.73,639.55 1435,593.82 1435,555 1460,530 1802.28,530 1825,507.28 v1(1825,450)
NetD7_1: D7.1 R16.1 | length 2089.9
  Top Layer w10: R16.1 1123,429.68 1123,392.92 1198.36,317.55 1354.19,317.55 1412.19,375.55 1476.73,375.55 1495.46,356.83 1495.46,136.83 1552.28,80 1975,80 2050,155 2050,350 1995,405 1787.28,405 1763,429.28 1763,641.82 1774.84,653.66 D7.1
NetJ2_2: J2.2 R5.2 | length 226.6
  Top Layer w10: J2.2 388.27,225.59 R5.2
NetJ2_3: J2.3 R6.2 | length 237.2
  Top Layer w10: J2.3 350,200 385,165 R6.2
NetL1_2: L1.2 U1.6 | length 213.5
  Top Layer w30: v1(370,1205) U1.6
  Bottom Layer w30: L1.2 287.32,1237.68 320,1205 v1(370,1205)
NetQ1_B: Q1.B R14.1 | length 79.1
  Top Layer w30: R14.1 612.4,1055.08 Q1.B
NetR1_1: R1.1 U3.22 | length 121.8
  Top Layer w10: R1.1 v1(1675,1325)
  Bottom Layer w10: U3.22 1665,1275 1675,1285 v1(1675,1325)
OSC_MCU1: C11.2 U2.5 X1.2 | length 266.5
  Top Layer w10: X1.2 C11.2@1160,675 ; C11.2 1162.2,684.53 U2.5
OSC_MCU2: C12.2 U2.6 X1.1 | length 577
  Top Layer w10: X1.1 865,610 1040,610 ; C12.2 1030,600 1040,610 ; U2.6 1214.84,664.84 1190,640 1130,640 1100,610 1080,610 1040,610
OSC_RTC1: C15.2 U2.3 X2.2 | length 506.2
  Top Layer w10: X2.2 925,832.68 960.32,868 1000,868 ; C15.2 1000,868 ; U2.3 1211.56,723.9 1202.46,733 1167,733 1155,745 1155,820 1130,845 1075,845 1052,868 1000,868
OSC_RTC2: C16.2 U2.4 X2.1 | length 319.9
  Top Layer w10: X2.1 1085,825 1105,805 C16.2 1105,755 1145,715 1195,715 1205.79,704.21 U2.4
PA11: R5.1 U2.32 | length 1350.5
  Top Layer w10: R5.1@487.32,240 R5.1 595,235 v1(600,240) ; v1(1383.66,693.66) 1396,706 1527.3,706 1548.77,684.53 U2.32
  Bottom Layer w10: v1(600,240) 600,269.54 765.46,435 900,435 1158.66,693.66 v1(1383.66,693.66)
PA12: R6.1 R7.2 U2.33 | length 1487.5
  Top Layer w10: R7.2 R6.1 492.32,175 v1(575,175) ; v1(1363.98,723.9) 1364.08,724 1534.75,724 1554.54,704.21 U2.33
  Bottom Layer w10: v1(575,175) 575,270 758,453 885.32,453 1143.98,711.66 1351.74,711.66 v1(1363.98,723.9)
RST: C22.2 R11.1 SW2.2 U2.7 | length 1864.8
  Top Layer w10: C22.2 776.18,1325 760,1308.82 R11.1 688.5,1167.32 675,1153.82 675,1058.74 615,998.74 615,950 700,865 806.73,865 825,883.27 v1(825,920) 872.52,920 SW2.2 ; U2.7 1346.34,645.16 v1(1346.73,645.55)
  Bottom Layer w10: v1(825,920) 840.55,935.55 1381.18,935.55 1426.73,890 1426.73,686.73 1385,645 1384.45,645.55 v1(1346.73,645.55)
RX: J3.2 U2.31 U3.18 | length 1866.4
  Top Layer w10: v1(1503.9,682.4) 1525.44,682.4 1543,664.84 U2.31 1677.44,664.84 1704.73,637.55 1704.73,445.55 1674.73,415.55 1616.73,415.55 1590,388.82 1590,212.28 1652.28,150 1800,150 1845,195 J3.2
  Bottom Layer w10: U3.18 v1(1400,1200) 1400,1185 1415,1170 1550,1170 1594.73,1125.27 1594.73,703.55 1573.58,682.4 v1(1503.9,682.4)
RX_ZIGBEE: J3.1 U2.30 U3.19 | length 1934.5
  Top Layer w10: v1(1523.58,651.73) 1530.16,645.16 U2.30 1657.13,645.16 1686.73,615.55 1686.73,475.55 1656.73,445.55 1606.73,445.55 1570.31,409.13 1570.31,181.97 1621.97,130.32 1863.15,130.32 1937.84,205 J3.1
  Bottom Layer w10: U3.19 v1(1450,1200) 1560,1200 1612.73,1147.27 1612.73,696.1 1568.37,651.73 v1(1523.58,651.73)
SWD_CLK: P3.3 U2.37 | length 848.6
  Top Layer w10: U2.37 1543.27,902.09 1566.73,925.55 1606.73,925.55 1636.73,895.55 1636.73,795.55 1656.73,775.55 1725,775.55 1745,755.55 P3.3
SWD_DIO: P3.2 U2.34 | length 746.6
  Top Layer w10: U2.34 1671.1,723.9 1722.73,672.27 1722.73,435.55 1696.73,409.55 1696.73,265.55 1716.73,245.55 1765.55,245.55 P3.2
SWITCH_1: C23.2 R12.1 SW3.3 SW3.4 U2.10 | length 1102.6
  Top Layer w10: U2.10 1207.36,586.1 1178,556.74 1178,388.83 1209.83,357 1298.18,357 v1(1316.73,375.55)
  Bottom Layer w10: SW3.4 1295,91.42 ; C23.2 1290,137.68 ; v1(1316.73,375.55) 1316.73,292.99 1315,291.26 1362.8,243.46 1362.8,137.8 1362.68,137.68 R12.1 1290,137.68 ; SW3.3 1295,91.42 ; 1290,137.68 1290,96.42 1295,91.42
SWITCH_2: C24.2 R13.1 SW4.3 SW4.4 U2.11 | length 1116.2
  Top Layer w10: v1(1225,380) 1212.28,380 1196,396.28 1196,541 1221.42,566.42 U2.11
  Bottom Layer w10: SW4.4 810,86.42 ; C24.2 812.5,132.68 ; SW4.3 810,86.42 ; v1(1225,380) 1180,380 932.68,132.68 R13.1 812.5,132.68 ; 810,86.42 812.5,88.92 812.5,132.68
X_SCL: U5.7
X_SDA: U5.6
pads on no net: SW1.0 SW1.1 U2.2 U2.13 U2.14 U2.15 U2.17 U2.21 U2.22 U2.25 U2.26 U2.27 U2.28 U2.29 U2.38 U2.39 U2.40 U2.41 U2.45 U2.46 U3.1 U3.2 U3.3 U3.4 U3.5 U3.6 U3.7 U3.8 U3.9 U3.14 U3.15 U3.16 U3.20 U3.21 U5.2 U5.4 U5.5 U5.14 U5.15 U5.19 U5.21 U5.22

## Polygon pours and split planes (outlines as drawn)
B- on Top Layer "Top Overlay-No Net" (solid, pour order 2): 0,0 250,0 250,50 350,50 350,0 1650,0 1650,50 1750,50 1750,0 2075,0 2075,450 1875,450 1875,1273.27 1876.73,1275 2075,1275 2075,1385.55 2074.45,1385 600,1385 600,1335 500,1335 500,1385 0,1385 0,0
B- on Bottom Layer "Top Overlay-No Net" (solid, pour order 0): 0,0 250,0 250,50 350,50 350,0 1650,0 1650,50 1750,50 1750,0 2075,0 2075,450 1875,450 1875,1273.27 1876.73,1275 2075,1275 2075,1385.55 2074.45,1385 600,1385 600,1335 500,1335 500,1385 0,1385 0,0

## Keep-outs
Keep-Out Layer:
  lines w10: 600,1385 600,1335 500,1335 500,1385 0,1385 0,0 250,0 250,50 350,50 350,0 1650,0 1650,50 1750,50 1750,0 2075,0 2075,450 1875,450 1875,1275 2075,1275 2075,1385.55 600,1385.55

## Silkscreen, mask and mechanical layers (free items; w line width, h text height)
Top Overlay:
  lines w10: 600,1385 600,1335 500,1335 500,1385 0,1385 0,0 250,0 250,50 350,50 350,0 1650,0 1650,50 1750,50 1750,0 2075,0 2075,450 1875,450 1875,1275 2075,1275 2075,1385.55 600,1385.55
  text "3V" at 1776.73,175.55 h35 r90
  text "GND" at 1626.73,165.55 h35 r90
  text "CLK" at 1676.73,165.55 h35 r90
  text "DIO" at 1726.73,165.55 h35 r90
  text "RX" at 1816.73,105.55 h35
  text "TX" at 1916.73,105.55 h35
Bottom Overlay:
  lines w10: 600,1385 600,1335 500,1335 500,1385 0,1385 0,0 250,0 250,50 350,50 350,0 1650,0 1650,50 1750,50 1750,0 2075,0 2075,450 1875,450 1875,1275 2075,1275 2075,1385.55 600,1385.55

## Text inside footprints (layer, text, board x,y; h text height)
BZ1: Bottom Overlay "+" at 725,975 h50 r270